# EAGLE board qPCR_pcb_breakout_SN74LVC1G04DBVR (EAGLE 9.6.1)
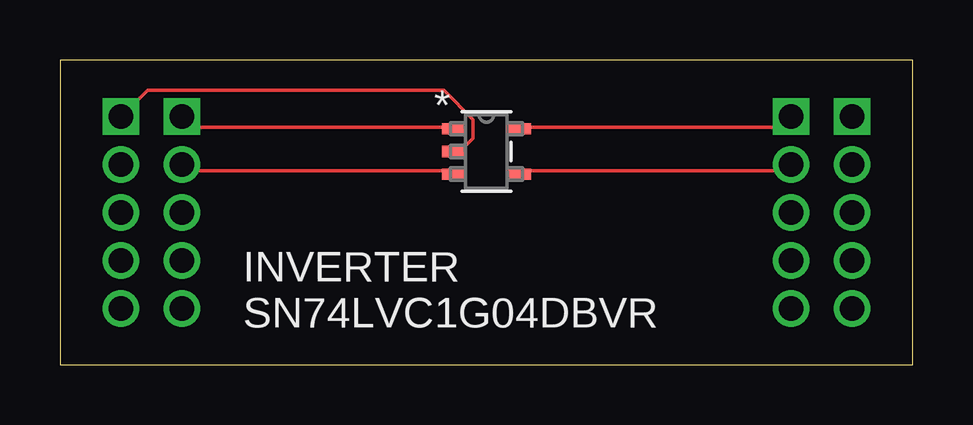
[diagram p0: board, top side]
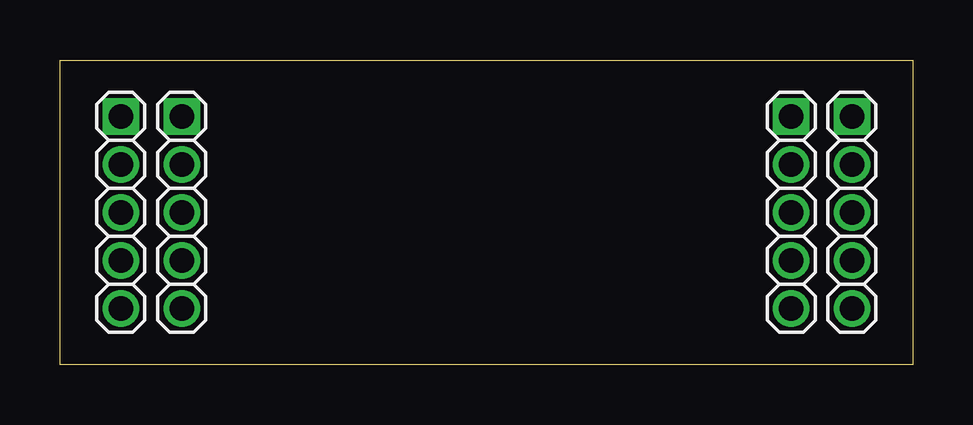
[diagram p1: board, bottom side, seen from below]

Size 35.56 x 12.7 mm. Coordinates in mm from the lower left corner, seen from the top.
Outline: 0,0 35.56,0 35.56,12.7 0,12.7 0,0
Copper layers (1*16): Top 0.035mm / dielectric 1.5mm / Bottom 0.035mm
Design rules "default": minimum track width 6mil, minimum drill 0.35mm, track to track 6mil, track to pad 6mil, pad to pad 6mil, via to via 6mil, smd to smd 6mil, copper to edge 40mil, drill to drill 6mil, minimum pad ring 10mil, minimum via ring 8mil, stop-mask expansion 4mil, vias tented up to drill 0mil, thermal gap 10mil

## Footprints (pad centres in the part's own frame; a part is rotated, then mirrored left to right if it is on the bottom)
1_05X2MM = drill 1.016 pad 1.3 square: 1 -4,0 | drill 1.016 pad 1.3: 2 -2,0; 3 0,0; 4 2,0; 5 4,0
DBV5 = smd 0.972 x 0.468: 1 -1.362,0.95; 2 -1.362,0; 3 -1.362,-0.95; 4 1.362,-0.95; 5 1.362,0.95

## Placement (x,y rotation side)
LEFT1  [1_05X2MM]  2.54,6.35 270 bottom
LEFT2  [1_05X2MM]  5.08,6.35 270 bottom
RIGHT1  [1_05X2MM]  30.48,6.35 270 bottom
RIGHT2  [1_05X2MM]  33.02,6.35 270 bottom
U1  SN74LVC1G04DBVR  [DBV5]  17.78,8.89 0 top

## Library data of the parts
LEFT1 LEFT2 RIGHT1 RIGHT2 = pinhead
U1 = Ninja_qPCR; DATASHEET_URL: http://www.ti.com/lit/gpn/SN74LVC1G04; DESCRIPTION: Single Inverter; FAMILY_NAME: LL INVERTER; GENERIC_PART_NUMBER: SN74LVC1G04; INDUSTRY_STD_PKG_TYPE: SOT-23; MANUFACTURER: Texas Instruments; MANUFACTURER_PART_NUMBER: SN74LVC1G04DBVR; PACKAGE_DESIGNATOR: DBV; PIN_COUNT: 5; VENDOR: Texas Instruments

## Nets
1: LEFT2.1 U1.1
2: LEFT1.1 U1.2
3: LEFT2.2 U1.3
4: LEFT1.2
5: LEFT2.3
6: LEFT1.3
7: LEFT2.4
8: LEFT1.4
9: LEFT2.5
10: LEFT1.5
11: RIGHT2.5
12: RIGHT1.5
13: RIGHT2.4
14: RIGHT1.4
15: RIGHT2.3
16: RIGHT1.3
17: RIGHT2.2
18: RIGHT1.2 U1.4
19: RIGHT2.1
20: RIGHT1.1 U1.5

## Tracks (layer width: path | path; a pad name or v marks a point on that pad's centre or on a via)
1
  Top 0.152: U1.1 16.31,9.91 5.49,9.91 5.18,10.21 LEFT2.1
2
  Top 0.152: U1.2 16.46,8.99 16.76,8.99 17.22,9.45 17.22,10.21 16,11.43 3.66,11.43 2.59,10.36 LEFT1.1
3
  Top 0.152: U1.3 16.31,8.08 5.33,8.08 5.18,8.23 LEFT2.2
18
  Top 0.152: U1.4 19.2,8.08 30.33,8.08 30.48,8.23 RIGHT1.2
20
  Top 0.152: U1.5 19.2,9.91 30.18,9.91 30.48,10.21 RIGHT1.1

## Text on the board
tPlace: INVERTER / SN74LVC1G04DBVR